# Altium PCB IRSensor.PcbDoc
Units mil, origin at the board's own origin, x right, y up, seen from the top; angles counter-clockwise.
Board outline 4035 x 1190 mil, 2 copper layers (Top Layer, Bottom Layer); 3 components, 0 nets, 18 pads, 0 vias.
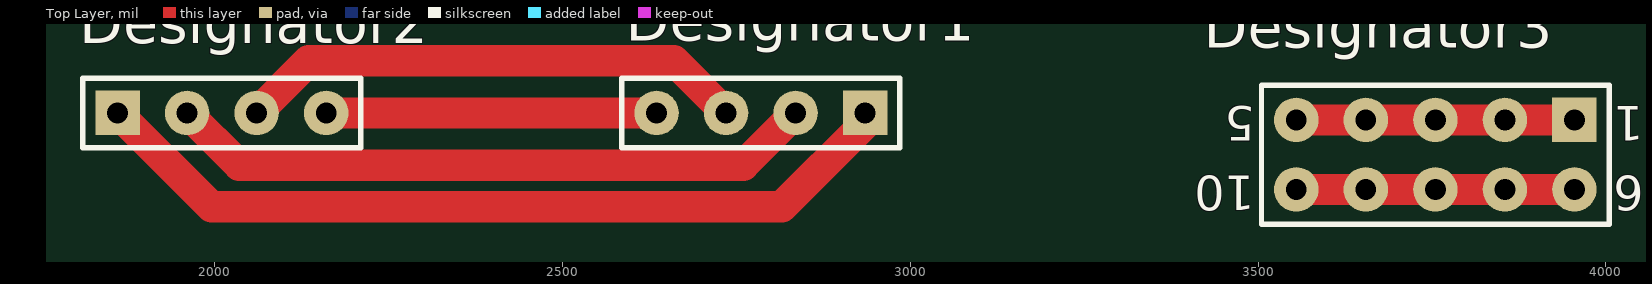
[diagram p0: Top Layer view]
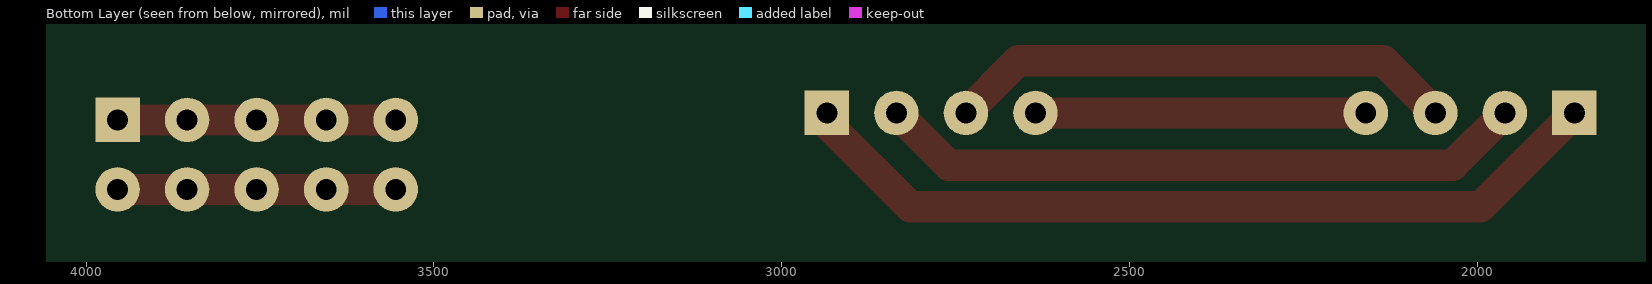
[diagram p1: Bottom Layer view, seen from below]

## Layer stack, top to bottom
Top Solder: solder mask 0.4, Solder Resist, Dk 3.5
Top Layer: signal copper 1.4
Dielectric 1: dielectric 12.6, FR-4, Dk 4.8
Bottom Layer: signal copper 1.4
Bottom Solder: solder mask 0.4, Solder Resist, Dk 3.5

## Board outline
1285,3060 1285,4250 5320,4250 5320,3060

## Design rules (kind name [scope] priority, off if disabled: settings)
Clearance [All] p1 off: gap=10 ignorepadtopadclearanceinfootprint=FALSE except(0: Arc-Hole Track-Hole SMDPad-Hole THPad-Hole Via-Hole Fill-Hole Poly-Hole Region-Hole Text-Hole)
PolygonConnect [All] p1: connectstyle=Relief reliefconductorwidth=10 reliefentries=4 polygonreliefangle="90 Angle" airgapwidth=10
RoutingVias [All] p1: holewidth=28 width=50 viastyle="Through Hole" minholewidth=28 minwidth=50 maxholewidth=28 maxwidth=50
SolderMaskExpansion [All] p1: expansion=4 istentingtop=FALSE
UnRoutedNet [All] p1 off:
Width [All] p1: maxlimit=50 minlimit=40 preferedwidth=45
29 further rules are at their usual default settings.

## Components (designator, comment, footprint, x,y, rotation, side; value= is the part's Value field where it differs from the comment)
Designator1 "Comment" HDR1X4 2935,3285 r180 top
Designator2 "Comment" HDR1X4 1860,3285 r0 top
Designator3 "Comment" HDR2X5_CEN 3955,3275 r180 top

## Footprints (in the part's own frame and the unit in brackets; to place one, negate y for a bottom-side part, rotate by r counter-clockwise, add the part's x,y. Pads: shape width x height; smd on the part's side, far side on the other; paste and mask are expansions set on the pad)
HDR1X4 [mil] "Connector; Header; 4 Position"
  rect 64x64 hole 30: 1(0,0)
  round 64 hole 30: 2(100,0) 3(200,0) 4(300,0)
  silkscreen extent -50,-50 350,50
HDR2X5_CEN [mil] "Connector; Header; 5x2 Position"
  rect 64x64 hole 30: 1(0,0)
  round 64 hole 30: 2(100,0) 3(200,0) 4(300,0) 5(400,0) 6(0,100) 7(100,100) 8(200,100) 9(300,100) 10(400,100)
  silkscreen extent -50,-50 450,150

## Nets (pads, with @x,y where several pads share a name; then routed paths per layer and width w, separated by ;. In a path a pad name is that pad's centre, name@x,y a point inside that pad or via, vN(x,y) a via of type N, cw(c..) or ccw(c..) an arc to the next point about the centre after c; other vN are vias at no path point)
pads on no net: Designator1.1 Designator1.2 Designator1.3 Designator1.4 Designator2.1 Designator2.2 Designator2.3 Designator2.4 Designator3.1 Designator3.2 Designator3.3 Designator3.4 Designator3.5 Designator3.6 Designator3.7 Designator3.8 Designator3.9 Designator3.10
copper on no net: | length 4144.9
  Top Layer w45: 1860,3285 1995,3150 2815,3150 2935,3270 2935,3285 ; 1960,3285 2035,3210 2665,3210 2760,3210 2835,3285 ; 2060,3285 2135,3360 2425,3360 2660,3360 2735,3285 ; 2160,3285 2635,3285 ; 3555,3175 3655,3175 3755,3175 3855,3175 3955,3175 ; 3555,3275 3655,3275 3755,3275 3855,3275 3955,3275

## Silkscreen, mask and mechanical layers (free items; w line width, h text height)
Drill Drawing:
  circle w10: c1935,3690 r59.06
  circle w10: c4670,3690 r59.06
  circle w10: c3760,3690 r59.06
  circle w10: c2845,3690 r59.06
  lines w10: 1285,3060 1285,4250 5320,4250 5320,3060 1285,3060 ; 1680,3464 1680,4645 2192,4645 2192,3464 1680,3464 ; 2590,3459 2590,4640 3102,4640 3102,3459 2590,3459 ; 3505,3459 3505,4640 4017,4640 4017,3459 3505,3459 ; 4415,3459 4415,4640 4927,4640 4927,3459 4415,3459

## Text inside footprints (layer, text, board x,y; h text height)
Designator3: Top Overlay "6" at 4055,3195 h50 r180; Top Overlay "10" at 3495,3195 h50 r180; Top Overlay "5" at 3495,3295 h50 r180; Top Overlay "1" at 4055,3295 h50 r180